# Altium PCB cannonrobot.PcbDoc
Units mil, origin at the board's own origin, x right, y up, seen from the top; angles counter-clockwise.
Board outline 2145.03 x 2455.03 mil, 2 copper layers (Top Layer, Bottom Layer); 26 components, 37 nets, 164 pads, 15 vias.
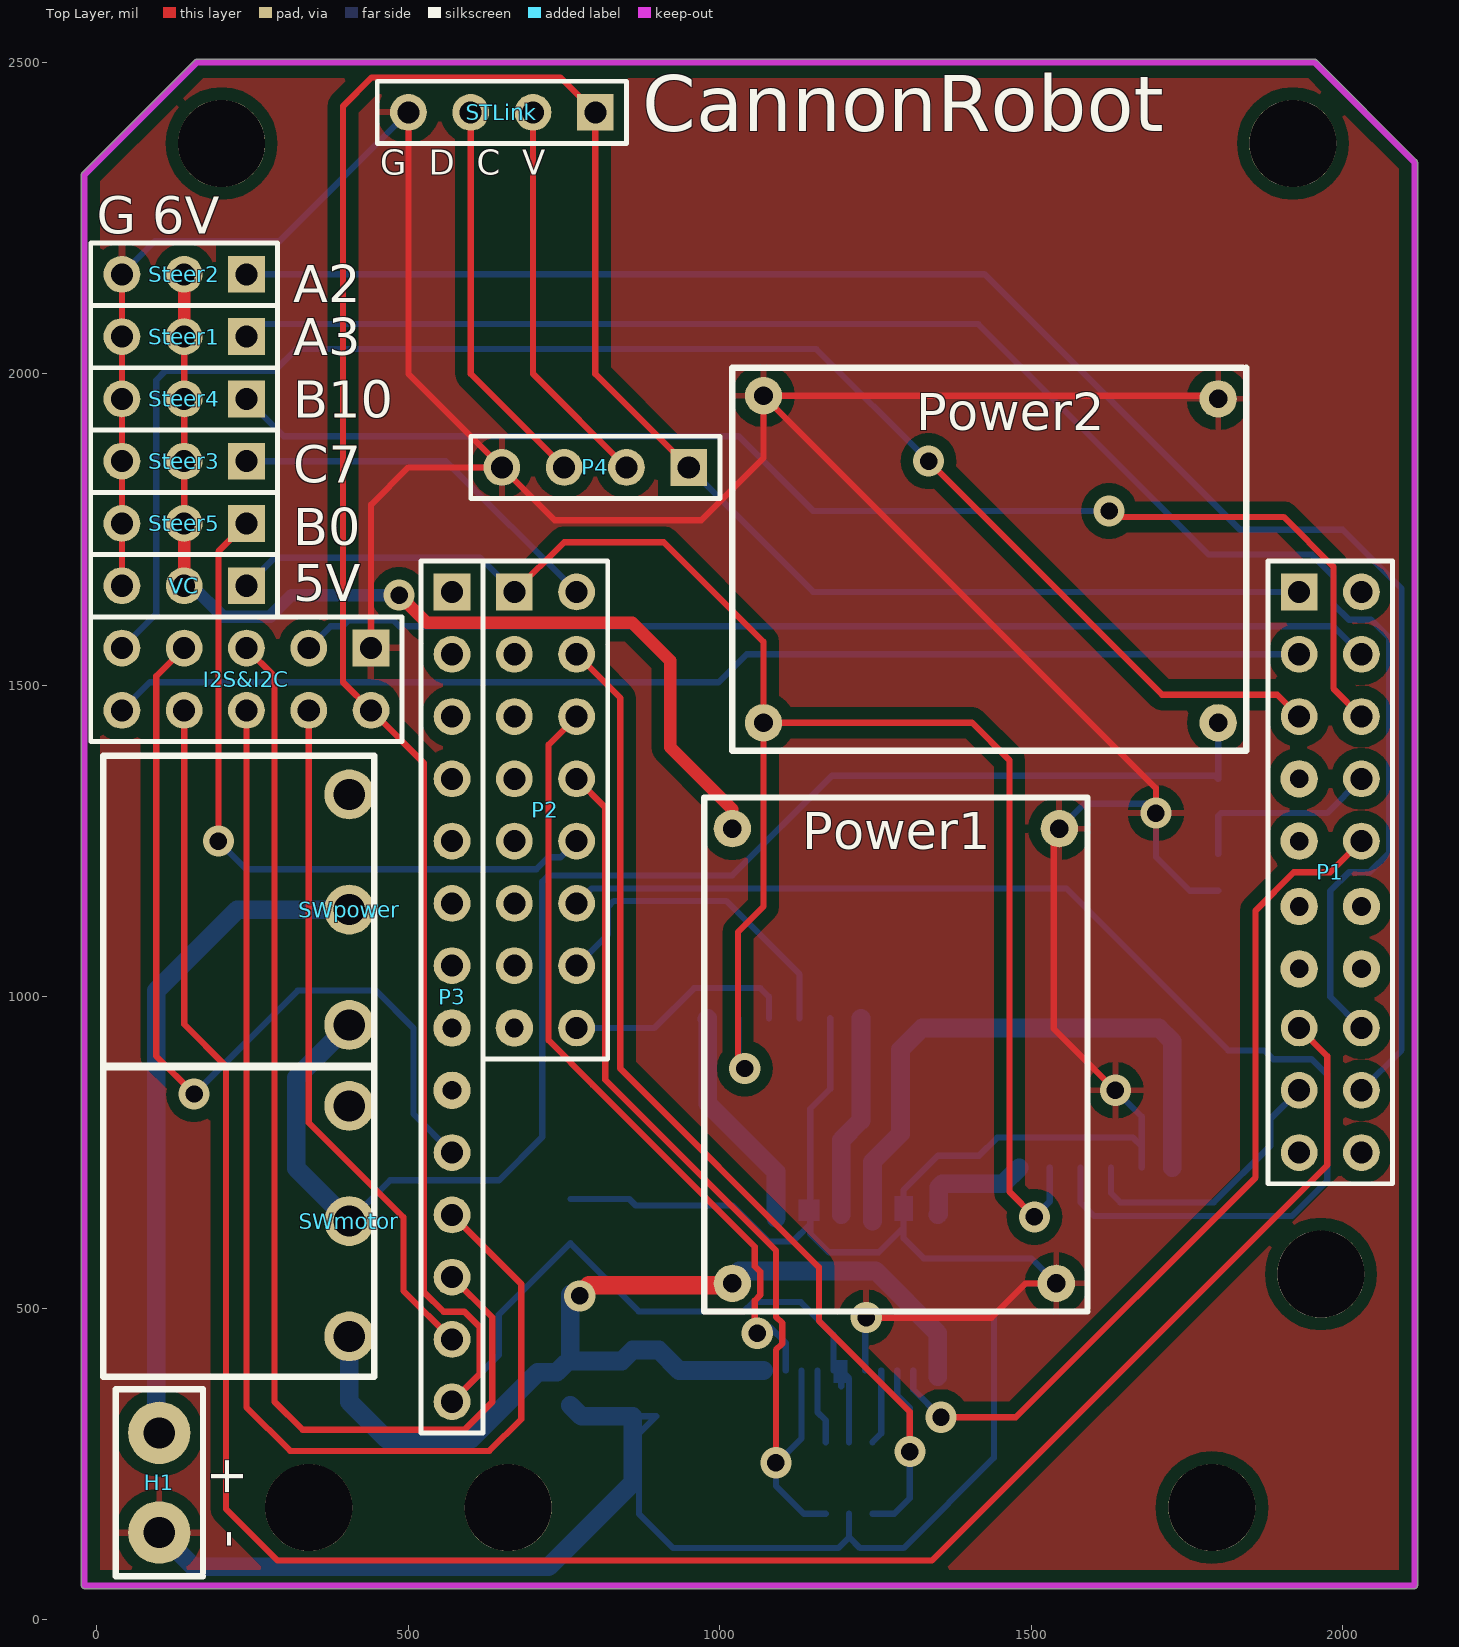
[diagram p0: Top Layer view]
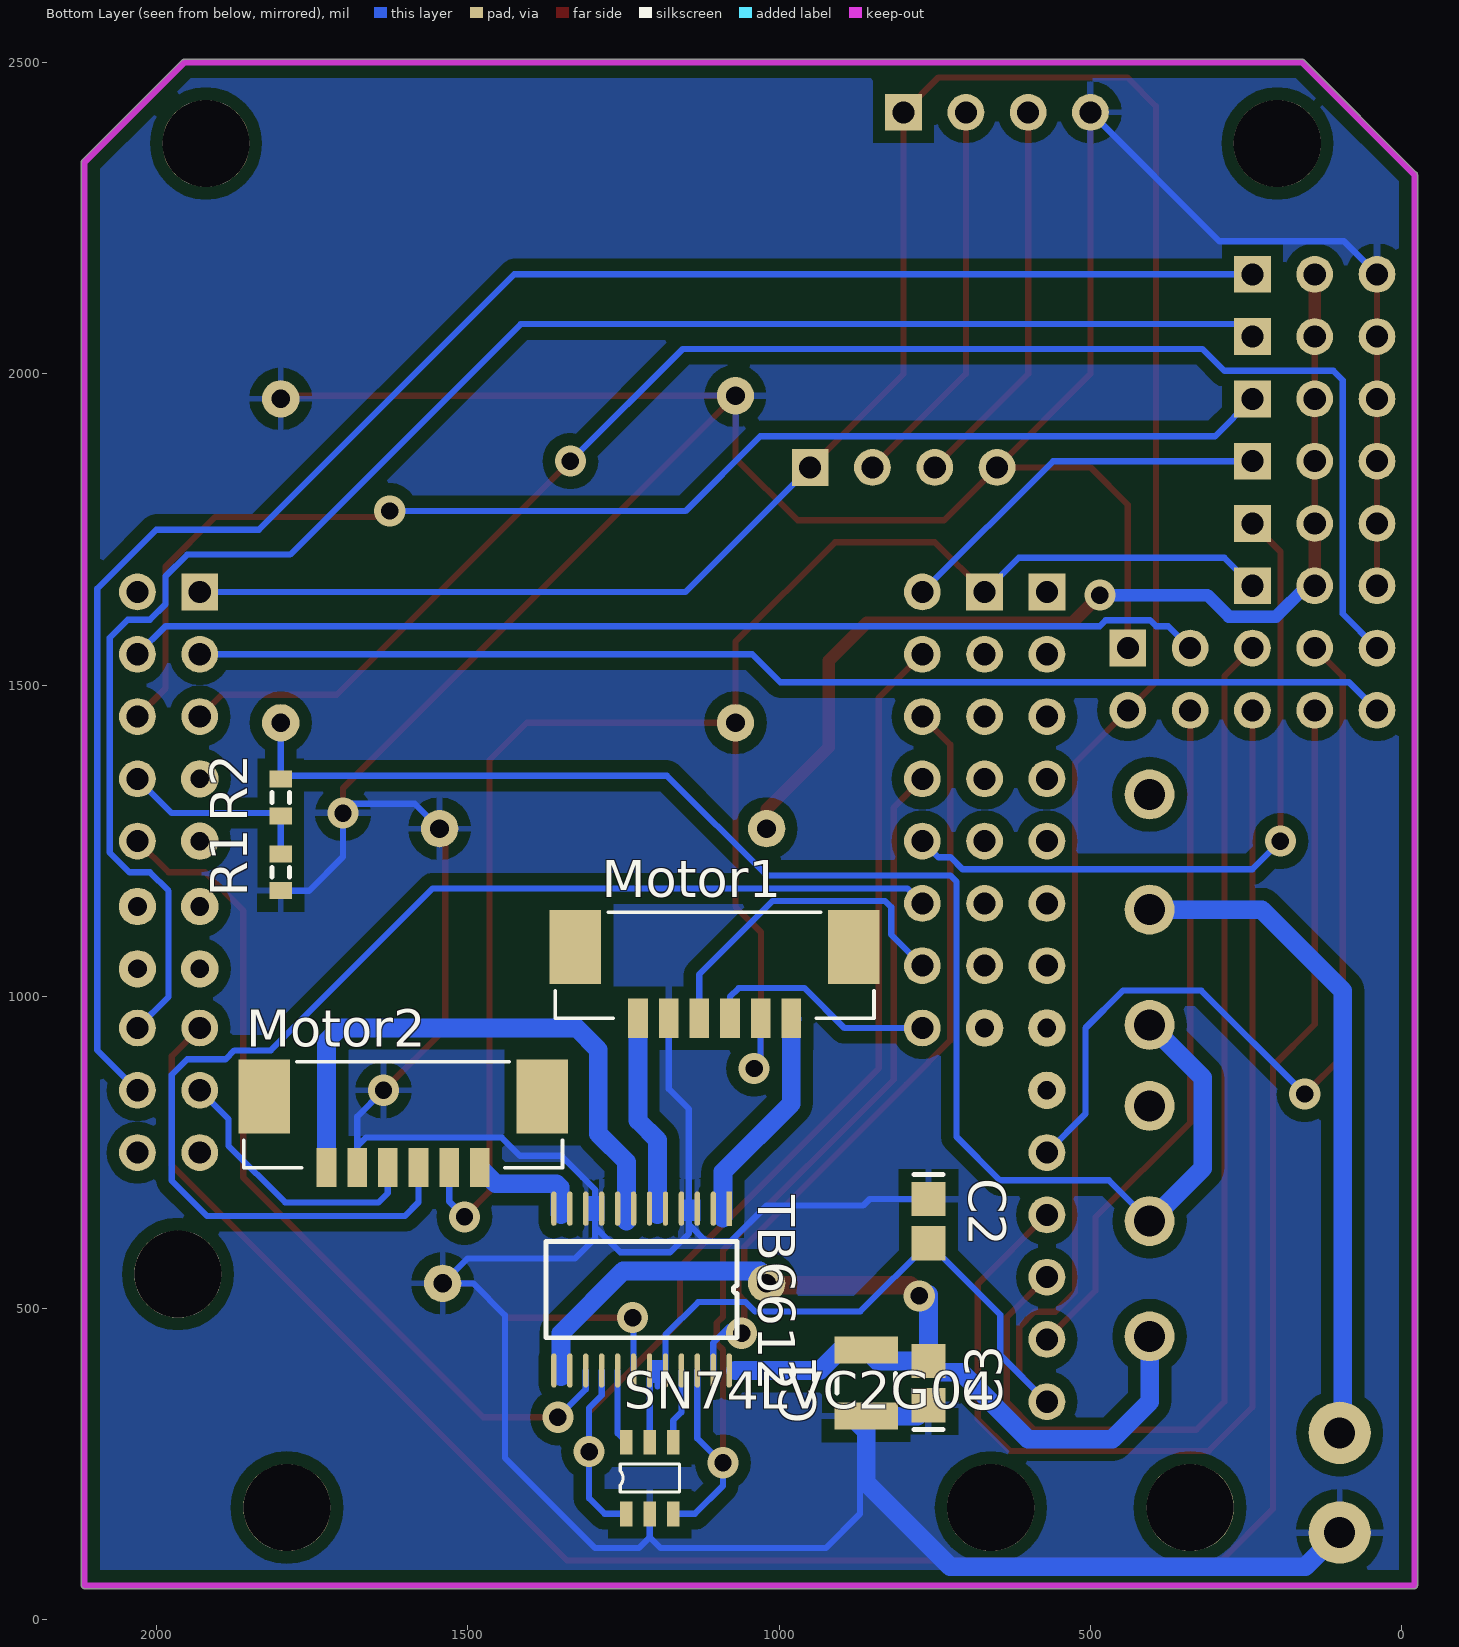
[diagram p1: Bottom Layer view, seen from below]

## Layer stack, top to bottom
Top Layer: signal copper 1.4
Dielectric: dielectric 12.6, FR-4, Dk 4.8
Bottom Layer: signal copper 1.4

## Board outline
-25.02,55 -25.02,2320 cw(c-20,2320) -23.53,2323.56 -23.55,2323.55 156.45,2503.55 156.44,2503.53 cw(c160,2500) 160,2505.02 1955,2505.02 cw(c1955,2500) 1958.56,2503.53 1958.55,2503.55 2118.55,2343.55 2118.53,2343.56 cw(c2115,2340) 2120.02,2340 2120.02,55 cw(c2115,55) 2115,49.99 -20,49.99 cw(c-20,55)

## Design rules (kind name [scope] priority, off if disabled: settings)
Clearance Clearance_1 [(InPolygon)] p1: gap=20
Clearance [All] p2: gap=10
ComponentClearance [All] p1: gap=0 collisioncheckmode=3 verticalgap=0 showdistances=FALSE
PolygonConnect [All] p1: connectstyle=Relief reliefconductorwidth=10 reliefentries=4 polygonreliefangle="90 Angle"
RoutingVias [All] p1: holewidth=28 width=50 viastyle="Through Hole" minholewidth=28 minwidth=50 maxholewidth=28 maxwidth=50
SilkToSilkClearance [All] p1: silktosilkclearance=0
SilkscreenOverComponentPads [All] p1: minsilkscreentomaskgap=0
SolderMaskExpansion [All] p1: expansion=4
Width [All] p1: maxlimit=30 minlimit=10 preferedwidth=10
25 further rules are at their usual default settings.

## Components (designator, comment, footprint, x,y, rotation, side; value= is the part's Value field where it differs from the comment)
C1 "Cap Semi" CAPC3225L 860,380 r90 bottom
C2 "Cap Semi" CAPC2512L 760,640 r270 bottom
C3 "Cap Semi" CAPC2512L 760,380 r90 bottom
H1 "Header 2" PCBComponent_1#1 100,300 r0 top
I2S&I2C "Header 5X2" HDR2X5 440,1560 r180 top
Motor1 "Header 8" J_JAT_A1250WV-S-06P 880,1080 r0 bottom
Motor2 "Header 8" J_JAT_A1250WV-S-06P 1380,840 r0 bottom
P1 "Header 10X2" HDR2X10 1930,1650 r270 top
P2 "Header 8X2" HDR2X8 670,1650 r270 top
P3 "Header 14" HDR1X14 570,1650 r270 top
P4 "Header 4" HDR1X4 950,1850 r180 top
Power1 "Header 2X2" PCBComponent_1#2 1020,540 r90 top
Power2 "Header 2X2" PCBComponent_1#2 1800,1440 r180 top
R1 "Res3" RESC1608L 1800,1200 r90 bottom
R2 "Res3" RESC1608L 1800,1320 r90 bottom
SN74LVC2G04 "Header 3X2" PCBComponent_1#3 1220,220 r90 bottom
Steer1 "Header 3" HDR1X3 240,2060 r180 top
Steer2 "Header 3" HDR1X3 240,2160 r180 top
Steer3 "Header 3" HDR1X3 240,1860 r180 top
Steer4 "Header 3" HDR1X3 240,1960 r180 top
Steer5 "Header 3" HDR1X3 240,1760 r180 top
STLink "Header 4" HDR1X4 800,2420 r180 top
SWmotor "SW-SPST" PCBComponent_1#4 -220,520 r0 top
SWpower "SW-SPST" PCBComponent_1#4 -220,1020 r0 top
TB6612 "Component_1" "SSOP24 - duplicate" 1080,660 r270 bottom
VC "Header 3" HDR1X3 240,1660 r180 top

## Footprints (in the part's own frame and the unit in brackets; to place one, negate y for a bottom-side part, rotate by r counter-clockwise, add the part's x,y. Pads: shape width x height; smd on the part's side, far side on the other; paste and mask are expansions set on the pad)
CAPC2512L [mm] "Chip Capacitor, Body 2.54x1.27mm, IPC High Density"
  rect 1.4x1.4 smd: 1(-0.9,0) 2(0.9,0)
  silkscreen extent -1.9,-0.6 -1.9,0.6, body extent -1.45,-0.82 1.45,0.82, height 1.3
CAPC3225L [mm] "Chip Capacitor, Body 3.2x2.5mm, IPC High Density"
  rect 1.1x2.6 smd: 1(-1.35,0) 2(1.35,0)
  silkscreen extent -0.4,-1.2 0.4,1.2, body extent -1.7,-1.35 1.7,1.35, height 1.5
HDR1X3 [mm] "Connector; Header; 3 Position"
  rect 1.5x1.5 hole 0.9: 1(0,0)
  round 1.5 hole 0.9: 2(2.54,0) 3(5.08,0)
  silkscreen extent -1.27,-1.27 6.35,1.27
HDR1X4 [mm] "Connector; Header; 4 Position"
  rect 1.5x1.5 hole 0.9: 1(0,0)
  round 1.5 hole 0.9: 2(2.54,0) 3(5.08,0) 4(7.62,0)
  silkscreen extent -1.27,-1.27 8.89,1.27
HDR1X14 [mm] "Connector; Header; 14 Position"
  rect 1.5x1.5 hole 0.9: 1(0,0)
  round 1.5 hole 0.9: 2(2.54,0) 3(5.08,0) 4(7.62,0) 5(10.16,0) 6(12.7,0) 7(15.24,0) 10(22.86,0) 11(25.4,0) 12(27.94,0) 13(30.48,0) 14(33.02,0)
  silkscreen extent -1.27,-1.27 34.29,1.27
HDR2X5 [mm] "Connector; Header; 5x2 Position"
  rect 1.5x1.5 hole 0.9: 1(0,0)
  round 1.5 hole 0.9: 2(0,2.54) 3(2.54,0) 4(2.54,2.54) 5(5.08,0) 6(5.08,2.54) 7(7.62,0) 8(7.62,2.54) 9(10.16,0) 10(10.16,2.54)
  silkscreen extent -1.27,-1.27 11.43,3.81
HDR2X8 [mm] "Connector; Header; 8x2 Position"
  rect 1.5x1.5 hole 0.9: 1(0,0)
  round 1.5 hole 0.9: 2(0,2.54) 3(2.54,0) 4(2.54,2.54) 5(5.08,0) 6(5.08,2.54) 7(7.62,0) 8(7.62,2.54) 9(10.16,0) 10(10.16,2.54) 11(12.7,0) 12(12.7,2.54) 13(15.24,0) 14(15.24,2.54) 16(17.78,2.54)
  silkscreen extent -1.27,-1.27 19.05,3.81
HDR2X10 [mm] "Connector; Header; 10x2 Position"
  rect 1.5x1.5 hole 0.9: 1(0,0)
  round 1.5 hole 0.9: 2(0,2.54) 3(2.54,0) 4(2.54,2.54) 5(5.08,0) 6(5.08,2.54) 8(7.62,2.54) 10(10.16,2.54) 15(17.78,0) 16(17.78,2.54) 17(20.32,0) 18(20.32,2.54) 19(22.86,0) 20(22.86,2.54)
  silkscreen extent -1.27,-1.27 24.13,3.81
J_JAT_A1250WV-S-06P [mm]
  rect 0.8x1.6 smd: 1(2.55,2.9) 2(3.8,2.9) 3(5.05,2.9) 4(6.3,2.9) 5(7.55,2.9) 6(8.8,2.9)
  rect 2.1x3 smd: 7(0,0) 8(11.35,0)
  silkscreen extent -0.82,-1.42 12.17,2.9, body extent -0.4,-1.37 11.75,3.53, height 4.77
PCBComponent_1#1 [mil]
  round 100 hole 50: 1(0,0) 2(0,-160)
  silkscreen extent -70,-230 70,70
PCBComponent_1#2 [mil]
  round 60 hole 30: 1(0,0) 2(730,0) 3(0,-520) 4(730,-525)
  silkscreen extent -45,-570 780,45
PCBComponent_1#3 [mil]
  rect 40x20 smd: 1(-50,25) 2(65,25) 3(-50,-12.5) 4(65,-12.5) 5(-50,-50) 6(65,-50)
  silkscreen extent -15,-60 30,35
PCBComponent_1#4 [mil]
  round 80 / inner round 60 / far side round 80 hole 50: 0(625,305)
  round 80 hole 50: 1(625,120) 2(625,-65)
  silkscreen extent 230,-130 665,367
RESC1608L [mm] "Chip Resistor, Body 1.6x0.8mm, IPC High Density"
  rect 0.7x0.9 smd: 1(-0.75,0) 2(0.75,0)
  silkscreen extent -0.2,-0.35 0.2,0.35, body extent -0.85,-0.48 0.85,0.48, height 0.9
"SSOP24 - duplicate" [mm]
  rect 1.397x0.22 smd: 1(0,0)
  oval 1.397x0.22 smd: 2(0,-0.65) 3(0,-1.3) 4(0,-1.95) 5(0,-2.6) 6(0,-3.25) 7(0,-3.9) 8(0,-4.55) 9(0,-5.2) 10(0,-5.85) 11(0,-6.5) 12(0,-7.15) 13(6.6,-7.15) 14(6.6,-6.5) 15(6.6,-5.85) 16(6.6,-5.2) 17(6.6,-4.55) 18(6.6,-3.9) 19(6.6,-3.25) 20(6.6,-2.6) 21(6.6,-1.95) 22(6.6,-1.3) 23(6.6,-0.65) 24(6.6,0)
  silkscreen extent 1.33,-7.48 5.27,0.33

## Part data
C1 C2 C3: "Capacitor (Semiconductor SIM Model)"
H1: "Header, 2-Pin"
I2S&I2C: "Header, 5-Pin, Dual row"
Motor1 Motor2: "Header, 8-Pin"
P1: "Header, 10-Pin, Dual row"
P2: "Header, 8-Pin, Dual row"
P3: "Header, 14-Pin"
P4 STLink: "Header, 4-Pin"
Power1 Power2: "Header, 2-Pin, Dual row"
R1 R2: "Resistor"
SN74LVC2G04: "Header, 3-Pin, Dual row"
Steer1 Steer2 Steer3 Steer4 Steer5 VC: "Header, 3-Pin"
SWmotor SWpower: "Single-Pole, Single-Throw Switch"

## Free pads (board coordinates)
  round 140 hole 140 unplated: 0(660,180) 1(340,180) 2(200,2370) 3(1920,2370) 4(1790,180)
  round 140 hole 140: 0(1965,555)
  round 60 hole 30: 1(570,850) 5(1930,1350) 6(1930,1250) 7(2030,1145) 8(2030,1045) 9(1930,1145) 10(1930,1045) 11(670,950) 12(570,950)

## Via types
v1: diameter 50, hole 28, Top Layer to Bottom Layer, 15 vias

## Nets (pads, with @x,y where several pads share a name; then routed paths per layer and width w, separated by ;. In a path a pad name is that pad's centre, name@x,y a point inside that pad or via, vN(x,y) a via of type N, cw(c..) or ccw(c..) an arc to the next point about the centre after c; other vN are vias at no path point)
!C5: SN74LVC2G04.2 TB6612.17 | length 121
  Bottom Layer w10: SN74LVC2G04.2 1259.13,299.13 TB6612.17
!C13: SN74LVC2G04.6 TB6612.21 | length 120.6
  Bottom Layer w10: TB6612.21 1156.77,333.23 1170,320 SN74LVC2G04.6
A0: Motor1.3 P2.16 | length 375.3
  Bottom Layer w10: P2.16 895,950 959,1014 1064.82,1014 1078.82,1000 Motor1.3
A1: Motor1.4 P2.14 | length 546
  Bottom Layer w10: P2.14 820,1100 820,1144.06 830,1154.06 1009.94,1154.06 1128.03,1035.97 Motor1.4
A2: P1.18 Steer2.1 | length 2895.7
  Bottom Layer w10: Steer2.1 1425,2160 1835,1750 2000,1750 2094.53,1655.47 2094.53,914.53 P1.18
A3: P1.16 Steer1.1 | length 2783.3
  Bottom Layer w10: Steer1.1 260,2080 1415,2080 1785,1710 1950.27,1710 1985,1675.27 1985,1630.47 2010,1605.47 2045.53,1605.47 2074.53,1576.47 2074.53,1231.56 2042.97,1200 2010,1200 1980,1170 1980,1000 P1.16
A8: Motor2.3 P2.12 | length 1993.6
  Bottom Layer w10: P2.12 794.06,1174.06 1555.94,1174.06 1815.94,914.06 1874.4,914.06 1888.46,900 1950,900 1975,875 1975,705 1918,648 1600.82,648 1578.82,670 Motor2.3
A9: Motor2.4 P1.17 | length 448.8
  Bottom Layer w10: Motor2.4 1628.03,684.9 1642.94,670 1793,670 1884,761 1884,804 P1.17
A10: I2S&I2C.8 P1.15 | length 3613.8
  Top Layer w10: I2S&I2C.8 140,956 207,889 207,178 290,95 1340,95 1975,730 1975,905 P1.15
AO1: Motor1.1 TB6612.1 TB6612.2 | length 368.2
  Bottom Layer w30: Motor1.1@979,964.43 Motor1.1 980.39,828.61 1090,719 1090,645
AO2: Motor1.6 TB6612.5 TB6612.6 | length 328.9
  Bottom Layer w30: 1195,650 1195,770 1226.46,801.46 Motor1.6
B0: P2.10 Steer5.1 | length 1140.9
  Top Layer w10: v1(195,1250) 195,1715 Steer5.1
  Bottom Layer w10: v1(195,1250) 240,1205 705.47,1205 724.67,1224.2 744.2,1224.2 P2.10
B6: I2S&I2C.10 P1.3 | length 1927.3
  Bottom Layer w10: I2S&I2C.10 85,1505 998,1505 1043,1550 P1.3
B7: I2S&I2C.9 P1.5 | length 2552.9
  Top Layer w10: v1(1335,1860) 1710,1485 1895,1485 P1.5
  Bottom Layer w10: I2S&I2C.9 95,1615 95,1990 110,2005 285,2005 320,2040 1155,2040 v1(1335,1860)
B8: P2.6 TB6612.23 | length 1279.7
  Top Layer w10: P2.6 725,1405 725,930 796,859 796,858.64 1056,598.64 1056,567.64 1065,558.64 1065,521.36 1056,512.36 1056,464 v1(1060.1,459.9)
  Bottom Layer w10: v1(1060.1,459.9) 1050,470 1080,470 1105.59,444.41 TB6612.23
B9: P1.10 TB6612.15 | length 1402.9
  Top Layer w10: v1(1355,325) 1475,325 1860,710 1860,1138.64 1921.36,1200 1980,1200 P1.10
  Bottom Layer w10: TB6612.15 1310.32,369.68 v1(1355,325)
B10: P1.6 Steer4.1 | length 2092.3
  Top Layer w10: v1@1644.5,1770.5 1904.97,1770.5 1985,1690.47 1985,1495 P1.6
  Bottom Layer w10: Steer4.1 300,1900 1030,1900 1150,1780 v1(1625,1780)
B12: I2S&I2C.4 P3.13 | length 1105.3
  Top Layer w10: I2S&I2C.4 340,798 492,646 492,528 P3.13
B13: I2S&I2C.5 P3.12 | length 1842.5
  Top Layer w10: I2S&I2C.5 285,1515 285,350 330,305 590,305 634.53,349.53 634.53,485.47 P3.12
B14: I2S&I2C.6 P3.11 | length 1984.1
  Top Layer w10: I2S&I2C.6 240,341 310,271 630,271 681,322 681,539 P3.11
B15: I2S&I2C.7 P3.10 | length 1431.2
  Top Layer w10: I2S&I2C.7 95,1515 95,905 v1(156,844)
  Bottom Layer w10: v1(156,844) 322,1010 448,1010 508,950 508,812 P3.10
BO1: Motor2.1 TB6612.11 TB6612.12 | length 197
  Bottom Layer w30: 1350,650 1351.55,651.55 1351.55,694.37 ; Motor2.1 1454.57,700 1360,700 ; 1351.55,694.37 1360,700 ; 1351.55,694.37 1357.18,700 1360,700
BO2: Motor2.6 TB6612.7 TB6612.8 | length 956.2
  Bottom Layer w30: 1245,640 1245,735 1290,780 1290,915 1325,950 1705,950 1726.46,928.54 Motor2.6
C3: P1.8 R1.2 R2.1 | length 315.6
  Bottom Layer w10: R1.2 R2.1 1804.53,1295 1975,1295 P1.8
C5: P2.4 SN74LVC2G04.1 TB6612.16 | length 1768.9
  Top Layer w10: P2.4 840,1480 840,885 1159,566 1159,480 1305,334 v1@1305,280
  Bottom Layer w10: SN74LVC2G04.1 1280,170 1305,195 v1(1305,270) v1@1305,266.57 ; TB6612.16 1284.72,360.28 1305,340 v1@1305,280
C6: I2S&I2C.3 P1.4 | length 1731
  Bottom Layer w10: I2S&I2C.3 375,1595 394.73,1595 404.26,1604.53 475.74,1604.53 485.27,1595 1985,1595 P1.4
C7: P2.2 Steer3.1 | length 617
  Bottom Layer w10: Steer3.1 560,1860 P2.2
C13: P2.8 SN74LVC2G04.5 TB6612.22 | length 1541.8
  Top Layer w10: P2.8 816,1304 816,866.92 1090,592.92 1090,486.57 1100.1,476.46 1100.1,443.33 1090,433.22 v1(1090,252) v1@1091,251
  Bottom Layer w10: v1(1090,252) 1090,215 1135,170 SN74LVC2G04.5 ; v1@1091,251 1131.18,291.18 TB6612.22
GND: C1.1 C2.1 C3.1 H1.2 I2S&I2C.1 Motor1.5 Motor2.5 P4.4 Power1.3 Power1.4 Power2.3 Power2.4 R1.1 SN74LVC2G04.3 Steer1.3 Steer2.3 Steer3.3 Steer4.3 Steer5.3 STLink.4 TB6612.3 TB6612.4 TB6612.9 TB6612.10 TB6612.18 VC.3 | length 9856.8
  Top Layer w10: VC.3 Steer5.3 Steer3.3 Steer4.3 Steer1.3 Steer2.3 ; I2S&I2C.1 440,1790 500,1850 P4.4 ; STLink.4 500,2000 P4.4 ; v1(1235,485) 1436,485 1491,540 Power1.3 ; Power1.4 1536,1261 1536,949 v1(1635,850) ; v1(1700,1295) 1700,1335 Power2.4 ; Power2.3 1795,1965 Power2.4 ; P4.4 735,1765 970,1765 1070,1865 Power2.4
  Bottom Layer w10: Steer2.3 93,2213 293,2213 STLink.4 ; C2.1 854.57,675.43 865,665 1020,665 1077.56,607.44 1117.44,607.44 1145,635 ; C1.1 898,326.85 870,298.85 870,170 925,115 1190,115 1207.5,132.5 ; Motor1.5 1177.24,852.24 1145,820 1145,635 ; SN74LVC2G04.3 1207.5,132.5 ; TB6612.18 1233.54,473.54 v1@1235,475 ; Power1.4 1585,1310 1685,1310 v1(1700,1295) 1700,1225 1754.53,1170.47 R1.1 ; v1(1635,850) 1677.24,807.76 1677.24,760 ; Motor2.5 1677.24,760 ; 1145,635 1145,620 1175,590 1255,590 1295,630 ; 1207.5,132.5 1225,115 1295,115 1440,260 1440,489 1491,540 Power1.3 1500,580 1327.44,580 1295,612.44 1295,630 ; 1295,630 1295,690 1350,745 1416,745 1445,774 1663.24,774 1677.24,760
  Bottom Layer w30: H1.2 155,85 725,85 860,220 C1.1 777.72,326.85 C3.1
POWER: H1.1 SWpower.1 | length 1085.9
  Bottom Layer w30: H1.1 95,295 95,1010 225,1140 SWpower.1
SWCLK: P4.2 STLink.2 | length 632.1
  Top Layer w10: STLink.2 700,2000 P4.2
SWDIO: P4.3 STLink.3 | length 632.1
  Top Layer w10: STLink.3 600,2000 P4.3
VC3.3: C2.2 I2S&I2C.2 P1.1 P3.14 P4.1 SN74LVC2G04.4 STLink.1 TB6612.19 TB6612.20 | length 5382.8
  Top Layer w10: P3.14 614.53,394.53 614.53,470 590,494.53 556.47,494.53 525,526 525,1375 I2S&I2C.2 395,1505 395,2430 441,2476 744,2476 STLink.1 800,2000 P4.1
  Bottom Layer w10: P3.14 645,425 645,489.57 C2.2 869.57,495 1038.64,495 1053.64,510 1130,510 1182.36,457.64 TB6612.20 ; P4.1 1150,1650 P1.1 ; 1195,375 1195,400 1207.5,387.5 SN74LVC2G04.4
VC5: Motor1.2 Motor2.2 P2.1 Power2.2 VC.1 | length 2997.7
  Top Layer w10: P2.1 750,1730 910,1730 1070,1570 Power2.2 ; v1@1029,885 1029,1104 1070,1145 Power2.2 ; v1(1505,646.82) 1465,686.82 1465,1380 1405,1440 Power2.2
  Bottom Layer w10: VC.1 285,1705 615,1705 P2.1 ; v1@1029,900 1029.61,900.61 Motor1.2 ; v1(1505,646.82) 1529.61,671.42 Motor2.2
  other v1: 1040,885
VC6: Power1.2 Steer1.2 Steer2.2 Steer3.2 Steer4.2 Steer5.2 VC.2 | length 1672.4
  Top Layer w10: Steer5.2 Steer3.2 Steer4.2 Steer1.2
  Top Layer w20: VC.2 Steer5.2 ; Steer1.2 Steer2.2 ; v1@487.66,1645 v1(485,1645) 529.53,1600.47 859.53,1600.47 920,1540 920,1401 1020,1301 Power1.2
  Bottom Layer w20: VC.2 152.66,1660 202.19,1610.47 277.81,1610.47 312.34,1645 v1(485,1645)
VC11.1: Power2.1 R2.2 SWmotor.1 SWpower.2 | length 2409.5
  Bottom Layer w10: SWmotor.1 470.47,705.47 645.47,705.47 715,775 715,1185 725,1195 1020,1195 1180,1355 1794.53,1355 R2.2 Power2.1
  Bottom Layer w30: SWmotor.1 320,725 320,870 SWpower.2
VM&STEER: C1.2 C3.2 Power1.1 SWmotor.2 TB6612.13 TB6612.14 TB6612.24 | length 1717.1
  Top Layer w30: v1(775,520) 775,522 790,537 Power1.1@1017,537 ; Power1.1 Power1.1@1020,554
  Bottom Layer w10: C3.2@753.59,412.34 C3.2
  Bottom Layer w30: SWmotor.2 405,350 465,290 600.32,290 707.44,397.13 738.38,397.13 C3.2@753.59,412.34 ; v1(775,520) 775,522 760,522 C3.2 842.28,415.43 C1.2 901.82,433.15 934.97,400 1070,400 ; Power1.1@1025,545 Power1.1 1020,549 1031,560 1250,560 1350,460 1350,390
pads on no net: Motor1.7 Motor1.8 Motor2.7 Motor2.8 P1.2 P1.19 P1.20 P2.3 P2.5 P2.7 P2.9 P2.11 P2.13 P3.1 P3.2 P3.3 P3.4 P3.5 P3.6 P3.7 SWmotor.0 SWpower.0

## Polygon pours and split planes (outlines as drawn)
GND on Bottom Layer "Bottom Layer-No Net" (solid, remove dead copper): 2115,55 2115,2340 1955,2500 160,2500 -20,2320 -20,55 2115,55
GND on Top Layer "Bottom Layer-No Net" (solid, remove dead copper): 2115,55 -20,55 -20,2320 160,2500 1955,2500 2115,2340 2115,55

## Keep-outs
Keep-Out Layer:
  lines w10: -20,55 2115,55 2115,555 2115,1012.5 2115,1927.5 2115,2340 1955,2500 160,2500 -20,2320 -20,55

## Other copper
Bottom Layer:
  rectangle net GND: 1280,640 1310,680
  rectangle net GND: 1126,640 1160,675
  rectangle net VC3.3: 1182.36,380 1205,417.26

## Silkscreen, mask and mechanical layers (free items; w line width, h text height)
Top Overlay:
  text "CannonRobot" at 875,2390 h90
  text "G  D  C  V" at 455,2320 h40
  text "G 6V" at 0,2225 h60
  text "A2" at 315,2115 h60
  text "A3" at 315,2030 h60
  text "B10" at 315,1930 h60
  text "C7" at 315,1825 h60
  text "B0" at 315,1725 h60
  text "5V" at 315,1635 h60
  text "-  +" at 235,115 h60 r90